# Altium PCB Optic.PcbDoc
Units mm, origin at the board's own origin, x right, y up, seen from the top; angles counter-clockwise.
Board outline 54 x 21 mm, 4 copper layers (Top Layer, VCC, GND, Bottom Layer); 68 components, 39 nets, 190 pads, 165 vias.
Unrouted connection lines stored in the file: 34.
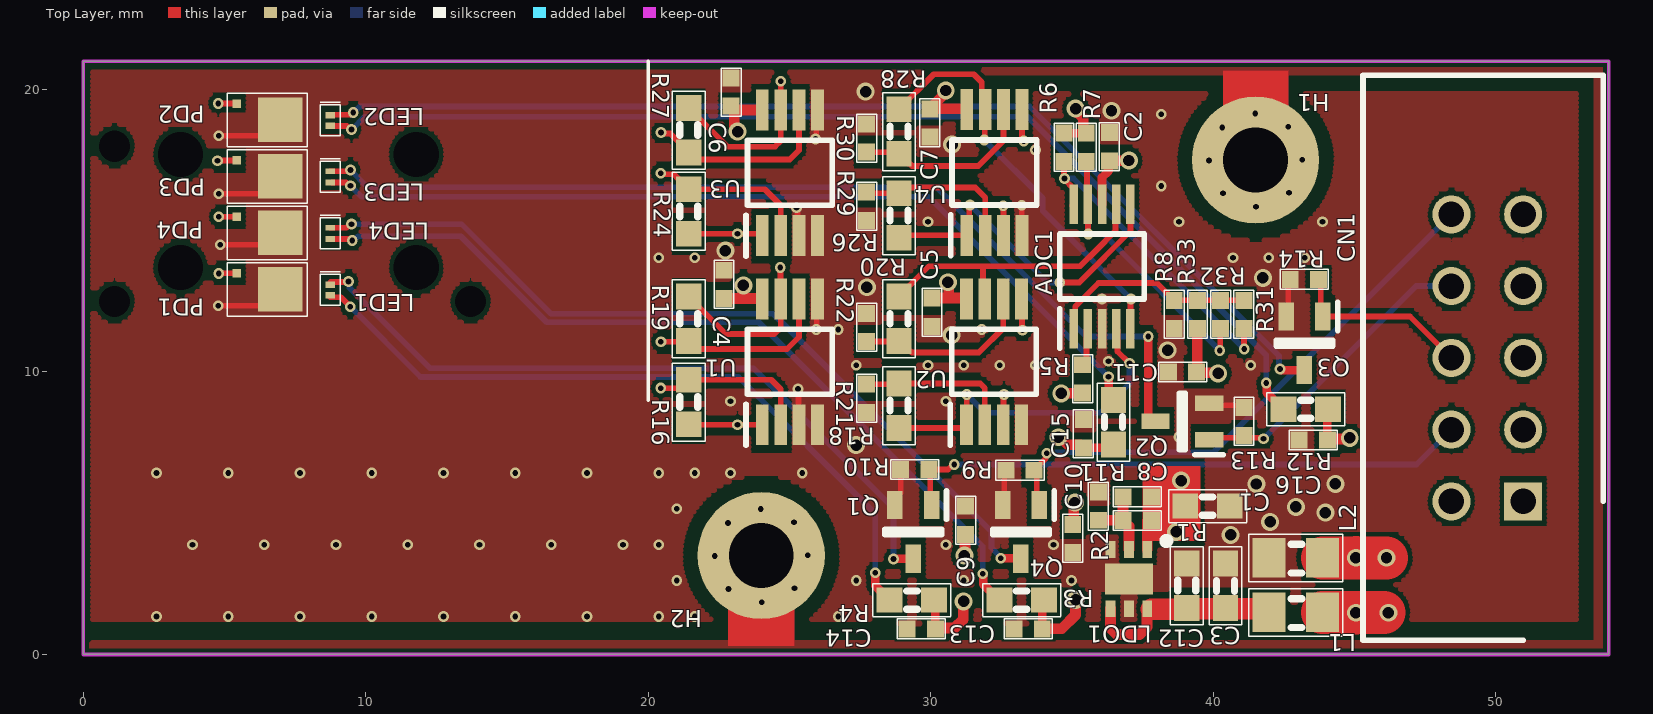
[diagram p0: Top Layer view]
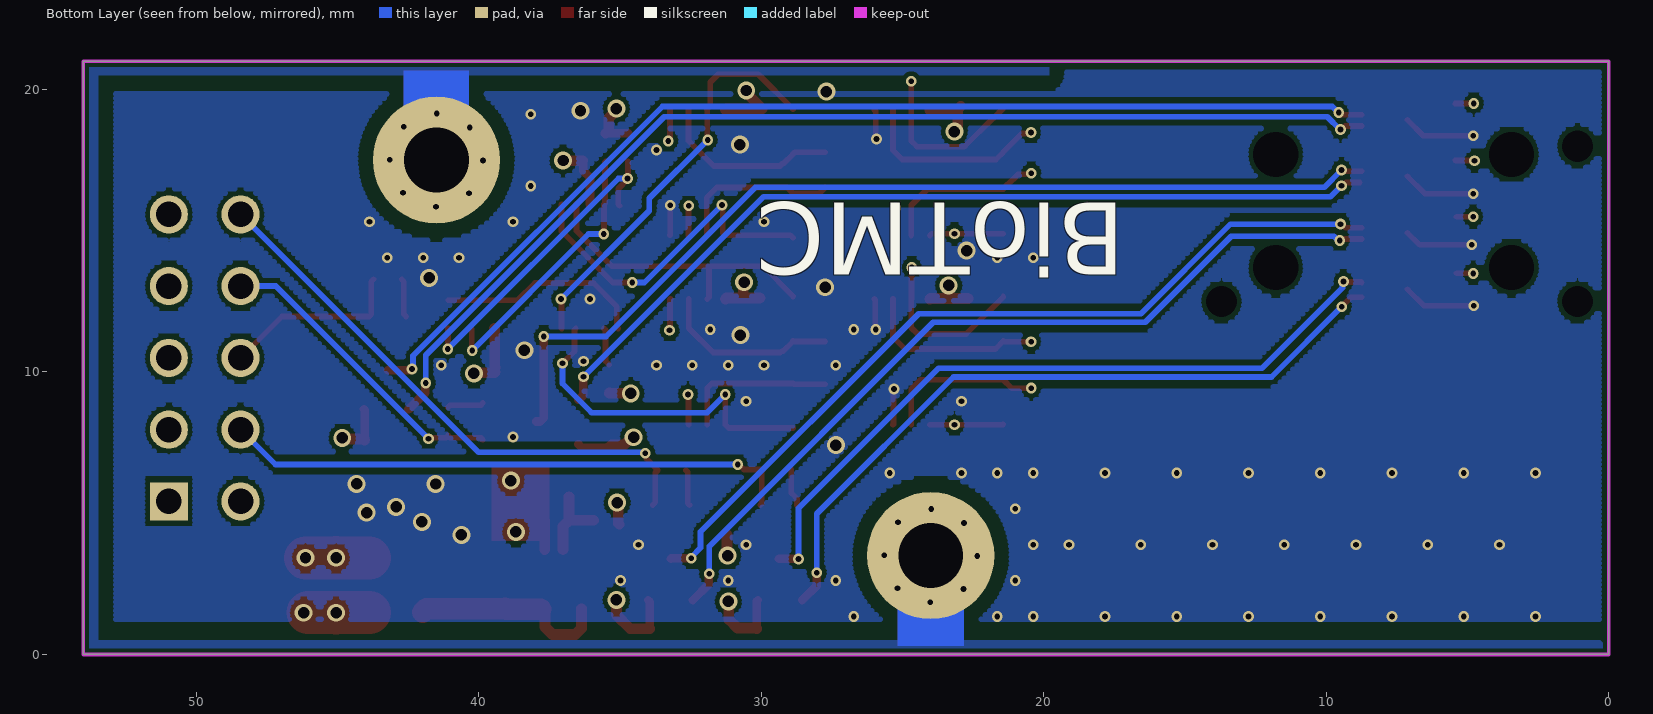
[diagram p1: Bottom Layer view, seen from below]
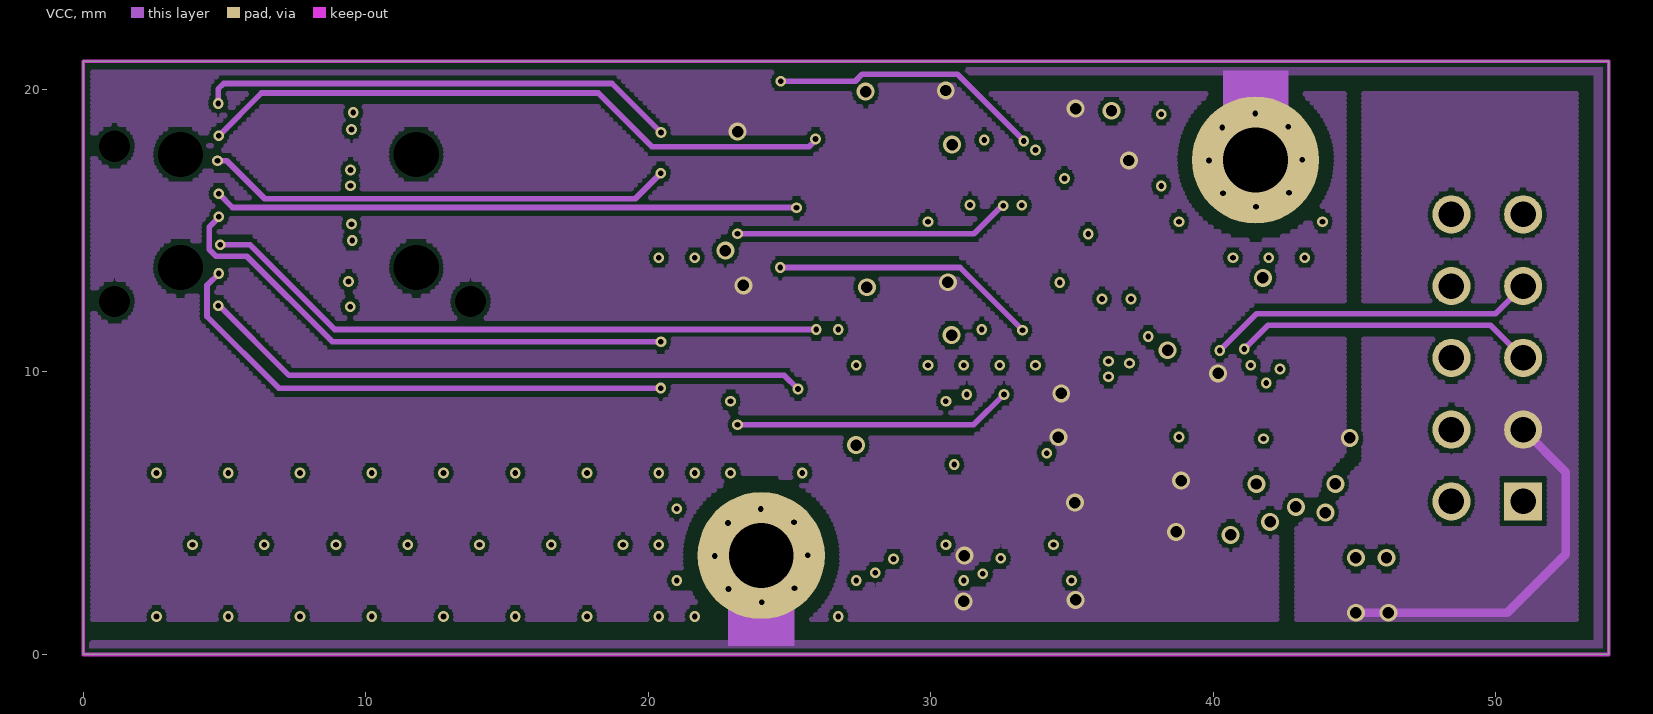
[diagram p2: VCC]
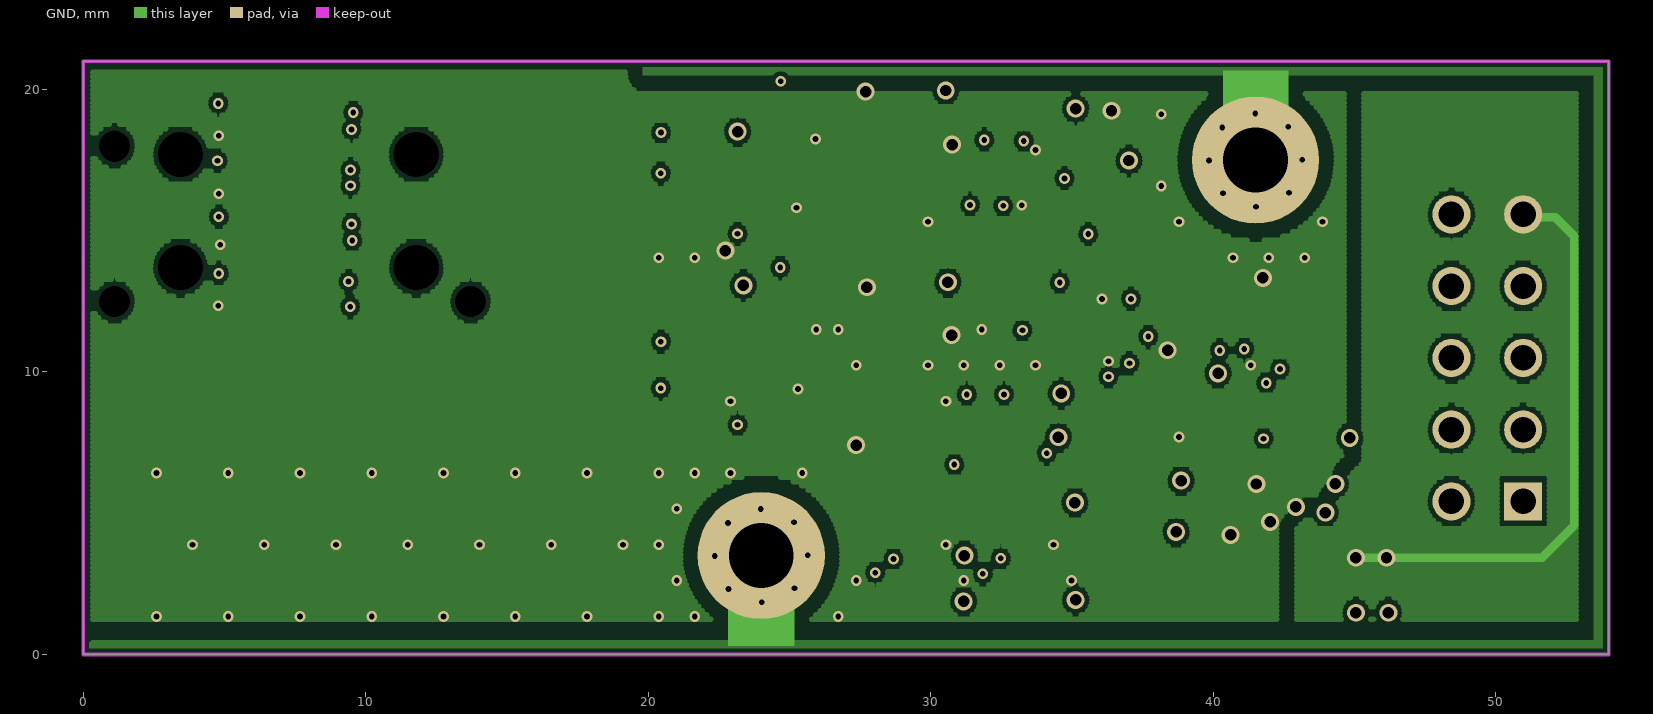
[diagram p3: GND]
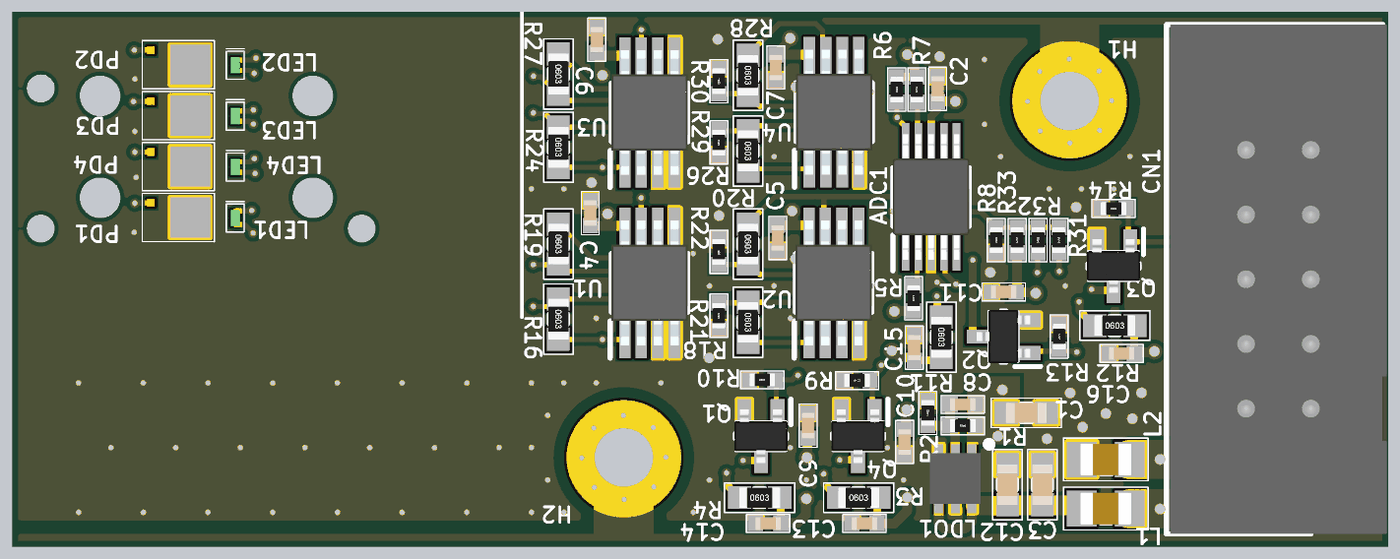
[diagram p4: 3D render of the assembled board from above, using the file's embedded part models]

## Layer stack, top to bottom
Top Solder: solder mask 0.0102, Solder Resist, Dk 3.5
Top Layer: signal copper 0.15
Dielectric 2: prepreg 0.32, PP-006, Dk 4.1
VCC: signal copper 0.15
Dielectric 1: dielectric 0.32, FR-4, Dk 4.8
GND: signal copper 0.15
Dielectric 3: prepreg 0.32, PP-006, Dk 4.1
Bottom Layer: signal copper 0.15
Bottom Solder: solder mask 0.0102, Solder Resist, Dk 3.5

## Board outline
0,0 54,0 54,21 0,21

## Design rules (kind name [scope] priority, off if disabled: settings)
BoardOutlineClearance [All] p1: gap=0.203 ignorepadtopadclearanceinfootprint=FALSE except(0: Arc-SplitContinuation Track-SplitContinuation SMDPad-SplitContinuation THPad-SplitContinuation Via-SplitContinuation Fill-SplitContinuation Poly-SplitContinuation Region-SplitContinuation Text-SplitContinuation)
Clearance "polygon to polygon" [InPoly vs InPoly] p1: gap=0.508 ignorepadtopadclearanceinfootprint=FALSE except(0: Arc-Hole Track-Hole SMDPad-Hole THPad-Hole Via-Hole Fill-Hole Poly-Hole Region-Hole Text-Hole)
Clearance "polygon to FG" [Inpoly vs InNet('FG')] p2: gap=0.508 ignorepadtopadclearanceinfootprint=FALSE except(0: Arc-Hole Track-Hole SMDPad-Hole THPad-Hole Via-Hole Fill-Hole Poly-Hole Region-Hole Text-Hole)
Clearance "polygon to All" [InPoly] p3: gap=0.152 ignorepadtopadclearanceinfootprint=FALSE
Clearance "Min. Space@4oz" [All] p4 off: gap=0.33 ignorepadtopadclearanceinfootprint=FALSE except(0: Arc-Hole Track-Hole SMDPad-Hole THPad-Hole Via-Hole Fill-Hole Poly-Hole Region-Hole Text-Hole)
Clearance "Min. Space@3oz" [All] p5 off: gap=0.254 ignorepadtopadclearanceinfootprint=FALSE except(0: Arc-Hole Track-Hole SMDPad-Hole THPad-Hole Via-Hole Fill-Hole Poly-Hole Region-Hole Text-Hole)
Clearance "Min. Space@2oz" [All] p6 off: gap=0.178 ignorepadtopadclearanceinfootprint=FALSE except(0: Arc-Hole Track-Hole SMDPad-Hole THPad-Hole Via-Hole Fill-Hole Poly-Hole Region-Hole Text-Hole)
Clearance "Min. Space@1oz" [All] p7: gap=0.102 ignorepadtopadclearanceinfootprint=FALSE except(0: Arc-Hole Track-Hole SMDPad-Hole THPad-Hole Via-Hole Fill-Hole Poly-Hole Region-Hole Text-Hole)
DiffPairsRouting [All] p1: maxlimit=0.254 minlimit=0.152 mostfreqgap=0.152 toplayer_minwidth=0.152 toplayer_maxwidth=0.381 toplayer_prefwidth=0.381 midlayer1_minwidth=0.152 midlayer1_maxwidth=0.381 midlayer1_prefwidth=0.381 midlayer2_minwidth=0.152 midlayer2_maxwidth=0.381 midlayer2_prefwidth=0.381 bottomlayer_minwidth=0.152 bottomlayer_maxwidth=0.381 bottomlayer_prefwidth=0.381 maxuncoupledlength=12.7
Height [All] p1 off: minheight=0 maxheight=25.4 prefheight=12.7
HoleSize [All] p1: absolutevalues=TRUE maxlimit=6.35 minlimit=0.203 maxpercent=80.000 minpercent=20.000
HoleToHoleClearance [All] p1: gap=0.305 allowstackedmicrovias=TRUE
MinimumSolderMaskSliver [All] p1 off: minsoldermaskwidth=0.254
NetAntennae [IsTrack] p1: netantennaetolerance=0
PolygonConnect [All] p1: connectstyle=Direct reliefconductorwidth=0.254 reliefentries=4 polygonreliefangle="90 Angle" airgapwidth=0.254
RoutingVias [All] p1: holewidth=0.203 width=0.381 viastyle="Through Hole" minholewidth=0.203 minwidth=0.381 maxholewidth=0.203 maxwidth=0.381
SilkToSilkClearance [All] p1 off: silktosilkclearance=0.102
SilkToSolderMaskClearance [IsPad] p1 off: minsilkscreentomaskgap=0.254 clearancetoexposedcopper=TRUE
SolderMaskExpansion [All] p1: expansion=0.102 istentingtop=FALSE
SupplyNets "Schematic Supply Nets_5" [InNet('FG')] p1: voltage=0.000
SupplyNets "Schematic Supply Nets_4" [InNet('DC5V')] p2: voltage=0.000
SupplyNets "Schematic Supply Nets_3" [InNet('VIN')] p3: voltage=0.000
SupplyNets "Schematic Supply Nets_2" [InNet('GND')] p4: voltage=0.000
SupplyNets "Schematic Supply Nets_1" [InNet('DC7_5V')] p5: voltage=0.000
SupplyNets "Schematic Supply Nets" [InNet('DGND')] p6: voltage=0.000
UnRoutedNet [All] p1: checkbadconnections=TRUE
Width Width@4oz [All] p1 off: maxlimit=3.048 minlimit=0.33 preferedwidth=0.508
Width Width@3oz [All] p2 off: maxlimit=3.048 minlimit=0.254 preferedwidth=0.406
Width Width@2oz [All] p3 off: maxlimit=3.048 minlimit=0.178 preferedwidth=0.305
Width Width@1oz [All] p4: maxlimit=3.048 minlimit=0.102 preferedwidth=0.203
21 further rules are at their usual default settings.

## Components (designator, comment, footprint, x,y, rotation, side; value= is the part's Value field where it differs from the comment)
ADC1 "ADS1115IDGSR" SOP50P490X110-10N 36.063,13.736 r90 top
C1 "298D106X9010M2T" CC0603 39.797,5.252 r180 top
C2 "0.1u/50V/0402/X7R" CC0402 36.323,17.975 r90 top
C3 "1u/50V/0603/X7R" CC0603 40.432,2.433 r90 top
C4 "0.1u/50V/0402/X7R" CC0402 22.682,13.101 r270 top
C5 "0.1u/50V/0402/X7R" CC0402 30.043,12.118 r90 top
C6 "0.1u/50V/0402/X7R" CC0402 22.936,19.908 r270 top
C7 "0.1u/50V/0402/X7R" CC0402 29.967,18.816 r90 top
C8 "10n/16V/0402/X7S" CC0402 37.308,5.582 r180 top
C9 "1u/16V/0402/X7S" CC0402 31.237,4.752 r90 top
C10 "1u/16V/0402/X7S" CC0402 35.026,4.109 r270 top
C11 "0.1u/50V/0402/X7R" CC0402 38.912,10.002 r180 top
C12 "298D106X9010M2T" CC0603 39.06,2.433 r270 top
C13 "0.1u/50V/0402/X7R" CC0402 33.447,0.909 r0 top
C14 "0.1u/50V/0402/X7R" CC0402 29.662,0.909 r0 top
C15 "0.1u/50V/0402/X7R" CC0402 35.403,7.817 r270 top
C16 "0.1u/50V/0402/X7R" CC0402 43.539,7.589 r0 top
CN1 "320-10" SHDR10W70P254_2X5_2000X850X900P 50.97,5.42 r90 top
H1 "Screw_holes_3p5mm" Screw_holes_2p3mm 41.5,17.5 r180 top
H2 "Screw_holes_3p5mm" Screw_holes_2p3mm 24,3.5 r180 top
L1 "BLM21PG221SN1D" CC0805 42.921,1.493 r180 top
L2 "BLM21PG221SN1D" CC0805 42.921,3.423 r180 top
LDO1 "TLV76701DRVT" SON65P200X200X80-7N 37.013,2.67 r270 top
LED1 "LTST-FC03BD-5A" LTST_FC03_LED 8.745,12.905 r270 top
LED2 "LTST-FC03GD-5A" LTST_FC03_LED 8.745,18.905 r270 top
LED3 "XZMYR155W" APG0603_LED 8.745,16.905 r270 top
LED4 "APG0603SEC-E-TT" APG0603_LED 8.745,14.905 r270 top
PD1 "TK0N60PDN" TK0N60PDN 6.975,12.925 r180 top
PD2 "TK0N60PDN" TK0N60PDN 6.975,18.925 r180 top
PD3 "TK0N60PDN" TK0N60PDN 6.975,16.925 r180 top
PD4 "TK0N60PDN" TK0N60PDN 6.975,14.925 r180 top
Q1 "MMBF0201NLT1" SOT65P210X110-3N 29.383,4.338 r270 top
Q2 "MMBF0201NLT1" SOT65P210X110-3N 38.906,8.249 r180 top
Q3 "MMBF0201NLT1" SOT65P210X110-3N 43.226,11.018 r270 top
Q4 "MMBF0201NLT1" SOT65P210X110-3N 33.193,4.338 r270 top
R1 "43.2k/1%/0402" CC0402_R 37.308,4.744 r180 top
R2 "8.2k/1%/0402" CC0402_R 35.933,5.252 r90 top
R3 "150/1%/0603" CC0603_R 33.218,1.925 r0 top
R4 "120/1%/0603" CC0603_R 29.332,1.925 r0 top
R5 "10k/1%/0402" CC0402_R 35.377,9.756 r270 top
R6 "10k/1%/0402" CC0402_R 34.717,17.952 r90 top
R7 "10k/1%/0402" CC0402_R 35.504,17.952 r90 top
R8 "10k/1%/0402" CC0402_R 38.62,12.037 r90 top
R9 "10k/1%/0402" CC0402_R 33.159,6.522 r0 top
R10 "10k/1%/0402" CC0402_R 29.434,6.547 r0 top
R11 "150/1%/0603" CC0603_R 36.468,8.224 r270 top
R12 "120/1%/0603" CC0603_R 43.277,8.681 r0 top
R13 "10k/1%/0402" CC0402_R 41.091,8.249 r270 top
R14 "10k/1%/0402" CC0402_R 43.226,13.278 r0 top
R16 "200M/5%/0603" CC0603_R 21.433,8.935 r270 top
R18 "10k/1%/0603" CC0603_R 28.875,8.808 r270 top
R19 "200M/5%/0603" CC0603_R 21.433,11.881 r270 top
R20 "10k/1%/0603" CC0603_R 28.875,11.881 r270 top
R21 "1k/1%/0402" CC0402_R 27.732,9.07 r90 top
R22 "1k/1%/0402" CC0402_R 27.732,11.577 r270 top
R24 "200M/5%/0603" CC0603_R 21.433,15.683 r270 top
R26 "10k/1%/0603" CC0603_R 28.875,15.537 r270 top
R27 "200M/5%/0603" CC0603_R 21.433,18.562 r270 top
R28 "10k/1%/0603" CC0603_R 28.875,18.511 r270 top
R29 "1k/1%/0402" CC0402_R 27.732,15.869 r90 top
R30 "1k/1%/0402" CC0402_R 27.732,18.282 r270 top
R31 "10k/1%/0402" CC0402_R 41.084,12.037 r90 top
R32 "10k/1%/0402" CC0402_R 40.262,12.037 r90 top
R33 "10k/1%/0402" CC0402_R 39.441,12.037 r90 top
U1 "AD8642ARMZ" SOP65P490X110-8N 25.013,10.357 r90 top
U2 "TLV9102IDGKR" SOP65P490X110-8N 32.24,10.357 r90 top
U3 "AD8642ARMZ" SOP65P490X110-8N 25.013,17.052 r90 top
U4 "TLV9102IDGKR" SOP65P490X110-8N 32.253,17.063 r90 top

## Footprints (in the part's own frame and the unit in brackets; to place one, negate y for a bottom-side part, rotate by r counter-clockwise, add the part's x,y. Pads: shape width x height; smd on the part's side, far side on the other; paste and mask are expansions set on the pad)
APG0603_LED [mm]
  rect 0.2x0.35 smd: 1(-0.2,0) 2(0.2,0)
  silkscreen extent -0.65,-0.35 0.55,0.35, body extent -0.33,-0.19 0.33,0.19, height 0.36
CC0402 [mm]
  rect 0.6x0.6 smd mask+0.07: 1(-0.5,0) 2(0.5,0)
  silkscreen extent -0.85,-0.35 0.85,0.35, body extent -0.5,-0.25 0.5,0.25, height 0.5
CC0402_R [mm]
  rect 0.6x0.6 smd mask+0.07: 1(-0.5,0) 2(0.5,0)
  silkscreen extent -0.85,-0.35 0.85,0.35, body extent -0.5,-0.25 0.5,0.25, height 0.35
CC0603 [mil]
  rect 36x35 smd: 1(-31,0) 2(31,0)
  silkscreen extent -54,-23 54,23, body extent -32,-16 31,16, height 31
CC0603_R [mil]
  rect 36x35 smd: 1(-31,0) 2(31,0)
  silkscreen extent -54,-23 54,23, body extent -32,-16 31,16, height 18
CC0805 [mil]
  rect 46x55 smd: 1(-37,0) 2(37,0)
  silkscreen extent -65,-33 65,33, body extent -39,-25 39,25, height 39
LTST_FC03_LED [mm]
  rect 0.225x0.35 smd: 1(-0.188,0) 2(0.188,0)
  silkscreen extent -0.65,-0.35 0.55,0.35, body extent -0.33,-0.19 0.33,0.19, height 0.36
Screw_holes_2p3mm [mm]
  round 4.5 hole 2.3: 1(0,0)
SHDR10W70P254_2X5_2000X850X900P [mm]
  rect 1.35x1.35 hole 0.9: 1(0,0)
  round 1.35 hole 0.9: 2(0,2.54) 3(2.54,0) 4(2.54,2.54) 5(5.08,0) 6(5.08,2.54) 7(7.62,0) 8(7.62,2.54) 9(10.16,0) 10(10.16,2.54)
  silkscreen extent -4.92,-2.83 15.08,5.67, body extent -4.92,-2.98 15.08,5.52, height 9
SON65P200X200X80-7N [mm]
  rect 0.6x0.35 smd: 1(-1.05,0.65) 2(-1.05,0) 3(-1.05,-0.65) 4(1.05,-0.65) 5(1.05,0) 6(1.05,0.65)
  rect 1.1x1.7 smd: 7(0,0)
  silkscreen extent -1.47,1.2 -1.23,1.45, body extent -1,-1 1,1, height 0.8
SOP50P490X110-10N [mm]
  rect 1.4x0.3 smd: 1(-2.2,1) 2(-2.2,0.5) 3(-2.2,0) 4(-2.2,-0.5) 5(-2.2,-1) 6(2.2,-1) 7(2.2,-0.5) 8(2.2,0) 9(2.2,0.5) 10(2.2,1)
  silkscreen extent -2.9,-1.5 1.15,1.5, body extent -2.46,-1.5 2.46,1.5, height 1.1
SOP65P490X110-8N [mm]
  rect 1.45x0.45 smd: 1(-2.225,0.975) 2(-2.225,0.325) 3(-2.225,-0.325) 4(-2.225,-0.975) 5(2.225,-0.975) 6(2.225,-0.325) 7(2.225,0.325) 8(2.225,0.975)
  silkscreen extent -2.95,-1.5 1.15,1.55, body extent -2.45,-1.5 2.45,1.5, height 1.1
SOT65P210X110-3N [mm]
  rect 1x0.55 smd: 1(-0.95,0.65) 2(-0.95,-0.65) 3(0.95,0)
  silkscreen extent -1.45,-1 0.1,1.17, body extent -1.05,-1.05 1.05,1.05, height 0.95
TK0N60PDN [mil]
  rect 11.81x11.81 smd paste-99999: 1(60.55,-22.5)
  rect 62x62 smd: 2(0,0)
  silkscreen extent -37,-37 74,38, body extent -30,-30 30,30, height 12

## Part data
ADC1: "類比數位轉換器 - ADC 16B ADC w/ Int MUX PGA Comp Osc & Ref", Manufacturer_Name="Texas Instruments", Mouser Part Number=595-ADS1115IDGSR, Arrow Part Number=ADS1115IDGSR, Arrow Price/Stock=https://www.arrow.com/en/products/ads1115idgsr/texas-instruments?region=nac, Datasheet Link=http://www.ti.com/lit/gpn/ADS1115, Height=1.1mm, Manufacturer_Part_Number=ADS1115IDGSR, Mouser Price/Stock=https://www.mouser.co.uk/ProductDetail/Texas-Instruments/ADS1115IDGSR?qs=IK5e5L0zOXjKCJoVMhYO%2FQ%3D%3D
C1 C12: "鉭電容 - 固態 SMD 10uF 10volts 10% M case MAP"
C2 C3 C4 C5 C6 C7 C8 C9 C10 C11 C13 C14 C15 C16: library part CAP_MLCC, "CAP_MLCC"
CN1: "IDC_(100y) VER TH 10POS 2.54MM"
H1 H2: library part Screw_holes, "Screw holes"
L1 L2: "Ferrite Bead_220 ohm @ 100 MHz, 2 A, 0805"
LDO1: "LDO電壓穩壓器 Adjustable- and fixed-output, 1-A, 16-V, positive-voltage low-dropout (LDO) linear regulator 6-WSON -40 to 125"
LED1 LED2 LED3 LED4: "0.65 mm x 0.35 mm SMD LED, 0.2 mm thickness"
PD1 PD2 PD3 PD4: "Si Photo-diode Chip"
Q1 Q2 Q3 Q4: "MOSFET (N-Channel)(百年)"
R1 R2 R3 R4 R5 R6 R7 R8 R9 R10 R11 R12 R13 R14 R16 R18 R19 R20 R21 R22 R24 R26 R27 R28 R29 R30 R31 R32 R33: library part RES_SMD, "RES_"
U1 U3: "精密放大器 DUAL LOW POWER/IBIAS, R-R JFET AMP", Manufacturer_Name="Analog Devices", Mouser Part Number=584-AD8642ARMZ, Arrow Part Number=AD8642ARMZ, Arrow Price/Stock=https://www.arrow.com/en/products/ad8642armz/analog-devices, Datasheet Link=https://datasheet.datasheetarchive.com/originals/distributors/Datasheets-SFU1/DSASFU10004012.pdf, Height=1.1mm, Manufacturer_Part_Number=AD8642ARMZ, Mouser Price/Stock=https://www.mouser.co.uk/ProductDetail/Analog-Devices/AD8642ARMZ?qs=%2FtpEQrCGXCwJxihq4VIKpw%3D%3D
U2 U4: "運算放大器 - 運放器", Manufacturer_Name="Texas Instruments", Mouser Part Number=595-TLV9102IDGKR, Arrow Part Number=TLV9102IDGKR, Arrow Price/Stock=https://www.arrow.com/en/products/tlv9102idgkr/texas-instruments?region=nac, Datasheet Link=https://www.ti.com/lit/gpn/TLV9102, Height=1.1mm, Manufacturer_Part_Number=TLV9102IDGKR, Mouser Price/Stock=https://www.mouser.co.uk/ProductDetail/Texas-Instruments/TLV9102IDGKR?qs=Wj%2FVkw3K%252BMCOPWdrVsfgbw%3D%3D

## Free pads (board coordinates)
  round 0.1 hole 1.1 unplated: 6(1.11,17.99) 6(1.11,12.49) 6(13.71,12.49)
  round 0.1 hole 1.6 unplated: 6(3.44,13.7) 6(3.44,17.7) 6(11.79,13.7) 6(11.79,17.7)

## Via types
v1: diameter 0.381, hole 0.203, Top Layer to Bottom Layer, tented both sides, 114 vias
v2: diameter 0.635, hole 0.406, Top Layer to Bottom Layer, tented both sides, 35 vias
v3: diameter 0.406, hole 0.203, Top Layer to Bottom Layer, 16 vias

## Nets (pads, with @x,y where several pads share a name; then routed paths per layer and width w, separated by ;. In a path a pad name is that pad's centre, name@x,y a point inside that pad or via, vN(x,y) a via of type N, cw(c..) or ccw(c..) an arc to the next point about the centre after c; other vN are vias at no path point)
DC5V: ADC1.8 C1.2 C2.1 C4.2 C5.2 C6.2 C7.2 C8.1 C9.1 C10.1 C11.1 C13.2 C14.2 C15.2 C16.2 LDO1.1 R1.1 R3.2 R4.2 R5.2 R6.2 R7.2 R11.2 R12.2 R33.1 U1.8 U2.8 U3.8 U4.8 | length 31
  Top Layer w0.305: R4.2 30.162,1.882 C14.2 ; C13.2 33.947,1.866 R3.2 ; R6.2 R7.2 ; C15.2 36.349,7.317 R11.2 ; ADC1.8 36.063,16.886 36.302,17.125 36.302,17.454 C2.1 ; C16.2 44.039,8.656 R12.2
  Top Layer w0.381: C4.2 23.351,12.601 ; C6.2 C6.2@23.045,19.298 ; v2(23.163,18.512) 23.163,18.581 23.045,18.698 C6.2@23.045,19.298 ; v2(23.365,13.065) 23.351,13.051 23.351,12.601 ; U1.8 24.019,12.601 23.351,12.601 ; U3.8 23.066,19.277 C6.2@23.045,19.298 ; C5.2 30.637,12.618 ; C14.2 30.188,0.934 30.839,0.934 31.148,1.243 31.148,1.862 v2(31.166,1.88) ; v2(30.531,19.964) 30.531,19.896 30.482,19.846 30.482,19.83 C7.2 31.25,19.316 U4.8 ; v2(30.607,13.177) 30.637,13.147 30.637,12.618 ; v2(31.191,3.499) 31.214,3.523 31.214,4.229 C9.1 ; U2.8@31.265,12.584 31.23,12.618 30.637,12.618 ; C13.2 34.64,0.909 35.128,1.397 v2(35.128,1.93) ; v2(34.518,7.69) 34.587,7.69 34.85,7.427 35.293,7.427 C15.2 ; v2(34.62,9.24) 34.628,9.248 35.369,9.248 R5.2 ; C10.1 35.064,4.647 35.064,5.341 v2(35.102,5.379) ; v2(35.128,19.324) 35.128,19.255 35.395,18.988 35.395,18.562 R7.2 ; C2.1 36.328,17.48 37.011,17.48 v2(37.017,17.486) ; LDO1.1 R1.1@37.663,4.744 ; R1.1 37.808,5.094 ; C8.1 37.808,5.094 ; v2(38.684,4.338) 38.732,4.386 C1.2@38.732,4.975 ; C1.2@38.743,4.985 38.743,4.998 38.839,5.094 37.808,5.094 ; C11.1 39.438,9.976 40.144,9.976 v2(40.17,9.951) ; C11.1@39.425,10.154 39.433,10.162 39.433,11.529 R33.1 ; C16.2 44.077,7.627 44.792,7.627 v2(44.831,7.665)
  Top Layer w0.762: v2(38.862,6.154) 38.933,6.082 38.933,5.316 38.997,5.252 C1.2
DC7_5V: C3.1 C12.2 L1.2 LDO1.4 LDO1.6 | length 7.1
  Top Layer w0.381: LDO1.4 36.363,0.933 36.586,0.71 37.388,0.71 37.655,0.977 LDO1.6@37.655,1.612
  Top Layer w0.762: LDO1.6@37.81,1.61 39.025,1.61 C12.2 ; C12.2@39.06,1.62 41.854,1.62 L1.2
DGND: CN1.9 L2.1 | length 22.8
  Top Layer w1.524: L2.1 v2@45.048,3.423 ; v2(45.05,3.425) v2@45.048,3.423 ; v2@46.133,3.423 v2@45.048,3.423
  GND w0.305: v2(45.05,3.425) v2(46.133,3.425) 51.639,3.425 52.781,4.566 52.781,14.802 52.102,15.481 51.069,15.481 CN1.9
FG: H1.1 H2.1 | length 0.1
  Bottom Layer w1.524: H2.1 H2.1@24.105,3.395
  other v3: 24.015,1.85 22.844,2.323 25.177,2.344 22.35,3.485 25.65,3.515 22.823,4.656 25.156,4.677 23.985,5.15 41.515,15.85 40.344,16.323 42.677,16.344 39.85,17.485 43.15,17.515 40.323,18.656 42.656,18.677 41.485,19.15
GND: ADC1.3 C1.1 C2.2 C3.2 C4.1 C5.1 C6.1 C7.1 C9.2 C10.2 C11.2 C12.1 C13.1 C14.1 C15.1 C16.1 L2.2 LDO1.3 LDO1.5 LDO1.7 PD1.2 PD2.2 PD3.2 PD4.2 Q1.2 Q2.2 Q3.2 Q4.2 R2.2 R8.1 R9.1 R10.1 R13.1 R14.1 R21.1 R22.1 R29.1 R30.1 U1.3 U1.4 U1.5 U2.4 U3.3 U3.4 U3.5 U4.4 | length 108.5
  Top Layer w0.203: v1(4.775,12.344) 6.544,12.344 PD1.2@7.125,12.925 ; v1(4.801,16.307) 6.507,16.307 PD3.2@7.125,16.925 ; v1(4.801,18.364) 6.564,18.364 PD2.2@7.125,18.925 ; v1(4.851,14.503) 6.703,14.503 PD4.2@7.125,14.925 ; v1(25.248,15.811) 25.282,15.777 25.282,14.883 U3.3 ; v1(25.299,9.399) 25.318,9.379 25.318,8.152 U1.3 ; v1(25.917,18.244) 25.951,18.278 25.951,19.241 U3.5 ; v1(25.945,11.507) 25.966,11.529 25.966,12.561 U1.5 ; Q1.2 28.733,5.513 28.934,5.713 R10.1 ; Q4.2 32.601,5.346 32.601,6.464 R9.1 ; v1(33.223,15.9) 33.226,15.898 33.226,14.84 U4.4 ; Q2.2 39.931,8.824 41.016,8.824 R13.1 ; Q3.2 42.651,12.043 42.651,13.203 R14.1 ; v2(43.967,5.023) v2@44.046,5.102
  VCC w0.203: v1(4.775,12.344) 4.82,12.344 7.284,9.881 24.817,9.881 v1(25.299,9.399) ; v1(4.801,16.307) 5.283,15.824 25.235,15.824 v1(25.248,15.811) ; v1(4.801,18.364) 6.311,19.875 18.229,19.875 20.126,17.977 25.697,17.977 25.917,18.198 v1(25.917,18.244) ; v1(4.851,14.503) 5.907,14.503 8.903,11.507 v1(25.945,11.507)
  other v1: 2.595,1.347 5.135,1.347 7.675,1.347 10.215,1.347 12.755,1.347 15.295,1.347 17.835,1.347 20.375,1.347 21.645,1.347 26.725,1.347 21.01,2.617 27.36,2.617 31.17,2.617 34.98,2.617 3.865,3.887 6.405,3.887 8.945,3.887 11.485,3.887 14.025,3.887 16.565,3.887 19.105,3.887 20.375,3.887 30.535,3.887 34.345,3.887 21.01,5.157 2.595,6.427 5.135,6.427 7.675,6.427 10.215,6.427 12.755,6.427 15.295,6.427 17.835,6.427 20.375,6.427 21.645,6.427 22.915,6.427 25.455,6.427 38.79,7.697 22.915,8.967 30.535,8.967 27.36,10.237 29.9,10.237 31.17,10.237 32.44,10.237 33.71,10.237 41.33,10.237 36.296,10.383 26.725,11.507 31.805,11.507 36.063,12.586 20.375,14.047 21.645,14.047 40.695,14.047 41.965,14.047 43.235,14.047 29.9,15.317 38.79,15.317 43.87,15.317 38.155,16.587 33.71,17.857 38.155,19.127
  other v2: 40.614,4.236 42.011,4.693 42.926,5.227 41.524,6.035 44.323,6.039 27.355,7.411 38.386,10.769 30.74,11.303 27.736,12.999 41.757,13.329 22.73,14.294 30.753,18.05 36.398,19.247 27.692,19.923
I2C_SCL: ADC1.10 CN1.5 R6.1 R31.1 | length 22
  Top Layer w0.203: v1@34.717,16.853 R6.1 ; v1(34.733,16.853) 34.733,16.815 35.063,16.486 ADC1.10 ADC1.10@35.015,15.887 ; R31.1 41.09,11.53 41.09,10.821 v1(41.097,10.815)
  VCC w0.203: v1(41.097,10.815) 41.935,11.653 49.817,11.653 CN1.5
  Bottom Layer w0.203: v1(34.733,16.853) 35.058,16.853 v1(41.097,10.815)
I2C_SDA: ADC1.9 CN1.7 R7.1 R32.1 | length 21.4
  Top Layer w0.203: R7.1 35.534,17.423 35.534,15.965 ADC1.9 35.57,15.929 35.57,14.886 v1(35.575,14.881) ; v1(40.233,10.764) 40.248,10.778 40.248,11.522 R32.1
  VCC w0.203: v1(40.233,10.764) 41.529,12.059 49.989,12.059 CN1.7
  Bottom Layer w0.203: v1(35.575,14.881) 36.116,14.881 v1(40.233,10.764)
LD1_C: CN1.4 Q1.1 R10.2 | length 20.4
  Top Layer w0.203: Q1.1 29.983,5.337 29.983,6.498 R10.2 30.609,6.547 30.787,6.725 v1(30.835,6.725)
  Bottom Layer w0.203: v1(30.835,6.725) 47.195,6.725 CN1.4
LD2_C: CN1.6 Q3.1 R14.2 | length 6.5
  Top Layer w0.203: R14.2 43.801,13.203 43.801,12.043 Q3.1 46.962,11.968 CN1.6
LD3_C: CN1.8 Q2.1 R13.2 | length 10.9
  Top Layer w0.203: Q2.1 39.931,7.674 41.016,7.674 R13.2 41.166,7.674 41.749,7.674 v1(41.783,7.64)
  Bottom Layer w0.203: v1(41.783,7.64) 47.183,13.04 CN1.8
LD4_C: CN1.10 Q4.1 R9.2 | length 19.9
  Top Layer w0.203: Q4.1 33.751,5.379 33.751,6.43 R9.2 34.072,6.935 34.072,7.091 v1(34.106,7.125)
  Bottom Layer w0.203: v1@34.106,7.157 40.007,7.157 CN1.10
NetADC1_1: ADC1.1 R8.2 R31.2 R32.2 R33.2 | length 7.4
  Top Layer w0.203: ADC1.1 35.111,11.584 35.111,12.322 35.94,13.151 38.006,13.151 R8.2 R33.2 R32.2 R31.2
NetADC1_2: ADC1.2 R5.1 | length 1.4
  Top Layer w0.203: R5.1 35.515,10.393 35.515,11.487 ADC1.2
NetC8_2: C8.2 LDO1.2 R1.2 R2.1 | length 2.8
  Top Layer w0.381: R2.1 35.937,4.748 36.804,4.748 R1.2 ; C8.2 R1.2 ; LDO1.2 37.013,4.538 R1.2
NetLED1_1: LED1.1 Q1.3 | length 25.9
  Top Layer w0.203: LED1.1@8.745,13.168 8.762,13.185 9.376,13.185 v1(9.393,13.202)
  Top Layer w0.305: v1(28.682,3.383) 28.687,3.388 Q1.3
  Bottom Layer w0.203: v1(9.393,13.202) 9.427,13.168 9.427,12.979 12.272,10.134 23.728,10.134 28.682,5.18 v1(28.682,3.383)
NetLED1_2: LED1.2 R4.1 | length 25.7
  Top Layer w0.203: LED1.2@8.745,12.643 9.119,12.643 v1(9.448,12.313)
  Top Layer w0.305: v1(28.033,2.894) 28.033,2.436 R4.1
  Bottom Layer w0.203: v1(9.448,12.313) 11.939,9.823 23.194,9.823 28.033,4.983 v1(28.033,2.894)
NetLED2_1: LED2.1 Q3.3 | length 38.7
  Top Layer w0.203: LED2.1@8.745,19.105 9.448,19.105 9.529,19.187 v1(9.558,19.187)
  Top Layer w0.305: v1(42.362,10.103) 42.383,10.103 42.418,10.068 Q3.3
  Bottom Layer w0.203: v1(9.558,19.187) 9.577,19.187 9.791,19.4 33.5,19.4 42.328,10.572 42.328,10.137 v1(42.362,10.103)
NetLED2_2: LED2.2 R12.1 | length 39
  Top Layer w0.203: LED2.2@8.745,18.705 9.328,18.705 9.446,18.587 v1(9.495,18.587)
  Top Layer w0.305: v1(41.876,9.614) 41.89,9.599 41.89,9.267 42.477,8.681 R12.1
  Bottom Layer w0.203: v1(9.495,18.587) 9.515,18.587 9.962,19.035 33.434,19.035 41.876,10.593 v1(41.876,9.614)
NetLED3_1: LED3.1 Q2.3 | length 34.6
  Top Layer w0.203: LED3.1 9.364,17.105 9.409,17.151 v1(9.458,17.151)
  Top Layer w0.305: v1(37.702,11.253) 37.702,8.372 37.825,8.249 Q2.3
  Bottom Layer w0.203: v1(9.458,17.151) 10.073,16.535 30.215,16.535 35.498,11.253 v1(37.702,11.253)
NetLED3_2: LED3.2 R11.1 | length 31.2
  Top Layer w0.203: LED3.2@8.818,16.705 9.299,16.705 9.409,16.594 v1(9.458,16.594)
  Top Layer w0.305: v1(36.289,9.833) 36.303,9.819 36.303,9.176 R11.1
  Bottom Layer w0.203: v1(9.458,16.594) 9.846,16.205 29.917,16.205 v1(36.289,9.833)
NetLED4_1: LED4.1 Q4.3 | length 29.8
  Top Layer w0.203: LED4.1 9.317,15.105 9.446,15.234 v1(9.495,15.234)
  Top Layer w0.305: v1(32.474,3.405) 33.175,3.405 Q4.3
  Bottom Layer w0.203: v1(9.495,15.234) 13.392,15.234 16.561,12.065 24.424,12.065 32.148,4.341 32.148,3.779 32.474,3.453 v1(32.474,3.405)
NetLED4_2: LED4.2 R3.1 | length 29.9
  Top Layer w0.203: LED4.2 9.428,14.705 9.477,14.656 v1(9.525,14.656)
  Top Layer w0.305: v1(31.843,2.855) 31.857,2.841 31.857,2.485 32.418,1.925 R3.1
  Bottom Layer w0.203: v1(9.525,14.656) 9.573,14.656 9.726,14.808 13.36,14.808 16.408,11.76 23.91,11.76 31.843,3.827 v1(31.843,2.855)
NetR18_1: R18.1 R21.2 U2.2 | length 5.6
  Top Layer w0.203: R21.2 28.849,9.57 R18.1 31.75,9.595 31.915,9.43 U2.2
NetR20_2: R20.2 R22.2 U2.6 | length 6.4
  Top Layer w0.203: R22.2 28.857,11.077 R20.2 28.875,11.081 29.218,10.738 29.286,10.738 29.337,10.688 31.702,10.688 32.565,11.551 U2.6
NetR26_1: R26.1 R29.2 U4.2 | length 5.8
  Top Layer w0.203: R29.2@27.732,16.53 27.93,16.331 28.119,16.331 28.126,16.325 R26.1 29.08,16.53 31.572,16.53 31.928,16.173 U4.2
NetR28_2: R28.2 R30.2 U4.6 | length 6.5
  Top Layer w0.203: R30.2 28.816,17.782 R28.2 28.875,17.711 29.218,17.368 29.258,17.368 29.337,17.29 31.683,17.29 32.578,18.184 U4.6
OP1_O: ADC1.4 R18.2 U2.1 | length 12.1
  Top Layer w0.203: R18.2 31.153,8.021 U2.1 31.27,8.137 31.27,9.197 v1(31.275,9.202) ; ADC1.4 36.611,11.487 36.611,10.728 v1(37.033,10.307)
  Bottom Layer w0.203: v1(31.275,9.202) 31.915,8.561 36.005,8.561 37.033,9.589 v1(37.033,10.307)
OP2_O: ADC1.5 R28.1 U4.7 | length 14.5
  Top Layer w0.203: R28.1 28.875,19.311 30.103,20.539 31.525,20.539 31.805,20.259 31.805,19.411 U4.7 31.912,19.272 31.912,18.229 v1(31.897,18.213) ; ADC1.5 37.074,11.546 37.074,12.575 v1(37.084,12.586)
  Bottom Layer w0.203: v1(31.897,18.213) 33.962,16.148 33.962,15.708 v1(37.084,12.586)
OP3_O: ADC1.6 R26.2 U4.1 | length 12.1
  Top Layer w0.203: R26.2 28.963,14.838 U4.1 31.359,14.919 31.359,15.88 v1(31.393,15.914) ; v1(34.563,13.17) 35.258,13.17 37.073,14.986 37.073,15.925 ADC1.6
  Bottom Layer w0.203: v1(31.393,15.914) 34.137,13.17 v1(34.563,13.17)
OP4_O: ADC1.7 R20.1 U2.7 | length 10.8
  Top Layer w0.203: R20.1 28.875,12.682 29.94,13.747 31.851,13.747 ; U2.7 31.851,12.647 31.851,13.747 ; ADC1.7 36.544,15.916 36.544,14.999 35.839,14.294 35.292,13.747 31.851,13.747
PD1_C: PD1.1 R16.1 U1.2 | length 25.2
  Top Layer w0.203: v1(4.801,13.487) 4.805,13.492 5.389,13.492 PD1.1@5.389,13.497 ; v1(20.441,9.429) 21.139,9.429 R16.1 24.354,9.722 24.688,9.388 U1.2
  VCC w0.203: v1(4.801,13.487) 4.381,13.068 4.381,11.965 6.918,9.429 v1(20.441,9.429)
PD2_C: PD2.1 R27.2 U3.6 | length 24.5
  Top Layer w0.203: v1(4.781,19.502) 5.432,19.502 PD2.1 ; v1(20.451,18.476) 20.485,18.442 20.777,18.442 21.433,17.787 R27.2 21.687,17.52 25.009,17.52 25.338,17.848 U3.6
  VCC w0.203: v1(4.781,19.502) 4.775,19.507 4.775,20.015 4.973,20.213 18.715,20.213 v1(20.451,18.476)
PD3_C: PD3.1 R24.1 U3.2 | length 23.1
  Top Layer w0.203: v1(4.75,17.475) 4.76,17.486 5.426,17.486 PD3.1 ; v1(20.445,17.038) 20.479,17.004 20.9,17.004 21.077,16.826 21.09,16.826 21.433,16.483 R24.1 24.123,16.471 24.688,15.906 U3.2
  VCC w0.203: v1(4.75,17.475) 5.08,17.475 6.426,16.129 19.536,16.129 v1(20.445,17.038)
PD4_C: PD4.1 R19.2 U1.6 | length 25.8
  Top Layer w0.203: v1(4.801,15.494) 4.802,15.495 PD4.1@5.389,15.495 ; v1(20.447,11.074) 21.413,11.074 R19.2 21.712,10.815 24.912,10.815 25.338,11.24 U1.6
  VCC w0.203: v1(4.801,15.494) 4.801,15.479 4.458,15.136 4.458,14.34 4.701,14.097 5.791,14.097 8.814,11.074 v1(20.447,11.074)
TIA1_O: R16.2 U1.1 U2.3 | length 13.6
  Top Layer w0.203: R16.2 21.448,8.132 v1(23.163,8.132) U1.1 ; U2.3 32.579,8.146 32.579,9.193 v1(32.593,9.207)
  VCC w0.203: v1(23.163,8.132) 31.518,8.132 v1(32.593,9.207)
TIA2_O: R27.1 U3.7 U4.5 | length 16.8
  Top Layer w0.203: R27.1@21.433,19.362 R27.1 21.433,19.336 21.776,18.993 21.788,18.993 22.804,17.977 24.491,17.977 24.688,18.174 U3.7 ; U3.7 v1@24.688,20.294 ; U4.5 33.228,18.294 33.293,18.229 v1(33.293,18.181)
  VCC w0.203: v1(24.689,20.295) 27.327,20.295 27.571,20.539 30.95,20.539 v1@33.276,18.213
TIA3_O: R24.2 U3.1 U4.3 | length 13.5
  Top Layer w0.203: R24.2 v1(23.163,14.896) 23.969,14.896 U3.1 ; v1(32.565,15.881) 32.571,15.874 32.571,14.845 U4.3
  VCC w0.203: v1(23.163,14.896) 31.531,14.896 v1@32.548,15.913
TIA4_O: R19.1 U1.7 U2.5 | length 16.6
  Top Layer w0.203: R19.1 21.433,12.656 22.748,11.341 24.463,11.341 24.688,11.566 U1.7 24.682,12.588 24.682,13.691 v1(24.676,13.698) ; U2.5 33.23,12.568 33.23,11.49 v1(33.244,11.475)
  VCC w0.203: v1(24.676,13.698) 31.038,13.698 v1@33.228,11.507
VIN: CN1.3 L1.1 | length 15.5
  Top Layer w1.524: L1.1 v2@45.034,1.493 ; v2(45.05,1.477) v2@45.034,1.493 ; v2@46.043,1.493 v2@45.034,1.493
  VCC w0.305: v2(45.05,1.477) 46.197,1.477 50.403,1.477 52.476,3.55 52.476,6.454 CN1.3
  other v2: 46.197,1.478
pads on no net: CN1.1 CN1.2

## Polygon pours and split planes (outlines as drawn)
GND on GND "GND_L03_P014" (hatched Horizontal grid 0.152 track 0.203, remove dead copper, pour order 14): 54,0 20,0 0,0 0,21 54,21
FG on GND "FG_L03_P007" (solid, remove dead copper, pour order 7): 0,0.508 0,-0.001 54,-0.001 54,20.999 19.812,20.999 19.812,20.498 53.467,20.498 53.467,0.508
DGND on GND "DGND_L03_P010" (hatched Horizontal grid 0.152 track 0.203, pour order 10): 54,21 54,0 42.952,0 42.952,4.44 45.339,6.827 45.339,21
FG on VCC "FG_L02_P006" (solid, remove dead copper, pour order 6): 0,0.508 0,-0.001 54,-0.001 54,20.999 19.812,20.999 19.812,20.498 53.467,20.498 53.467,0.508
DC5V on VCC "DC5V_L02_P012" (hatched Horizontal grid 0.152 track 0.203, remove dead copper, pour order 12): 54,0 0,0 0,21 54,21
VIN on VCC "VIN_L02_P008" (hatched Horizontal grid 0.152 track 0.203, pour order 8): 54,21 54,0 42.952,0 42.952,4.44 45.339,6.827 45.339,21
FG on Top Layer "FG_L01_P005" (solid, remove dead copper, pour order 5): 0,0.508 0,-0.001 54,-0.001 54,20.999 19.812,20.999 19.812,20.498 53.467,20.498 53.467,0.508
GND on Top Layer "GND_L01_P011" (hatched Horizontal grid 0.152 track 0.203, remove dead copper, pour order 11): 54,0 20,0 0,0 0,21 54,21
FG on Bottom Layer "FG_L04_P009" (solid, remove dead copper, pour order 9): 0,0.508 0,-0.001 54,-0.001 54,20.999 19.812,20.999 19.812,20.498 53.467,20.498 53.467,0.508
GND on Bottom Layer "GND_L04_P013" (hatched Horizontal grid 0.152 track 0.203, remove dead copper, pour order 13): 54,0 20,0 0,0 0,21 54,21

## Keep-outs
Keep-Out Layer:
  lines w0.127: 0,0 0,21 54,21 54,0 20,0 0,0

## Other copper
Top Layer:
  rectangle net FG: 40.344,16.323 42.656,20.676
  rectangle net FG: 22.823,0.305 25.177,4.656
  region net DC5V: 39.545,6.674 37.488,6.674 37.488,4.02 39.545,4.02
VCC:
  rectangle net FG: 40.344,16.323 42.656,20.676
  rectangle net FG: 22.823,0.305 25.177,4.656
GND:
  rectangle net FG: 40.344,16.323 42.656,20.676
  rectangle net FG: 22.823,0.305 25.177,4.656
Bottom Layer:
  rectangle net FG: 40.344,16.323 42.656,20.676
  rectangle net FG: 22.823,0.305 25.177,4.656

## Silkscreen, mask and mechanical layers (free items; w line width, h text height)
Top Overlay:
  lines w0.127: 20,9 20,21
Bottom Overlay:
  text "BioTMC" at 17.119,15.996 h2.54 r180